# Altium PCB TMP116.PcbDoc
Units mil, origin at the board's own origin, x right, y up, seen from the top; angles counter-clockwise.
Board outline 6000 x 4000 mil, 2 copper layers (Top Layer, Bottom Layer); 4 components, 4 nets, 17 pads, 9 vias.
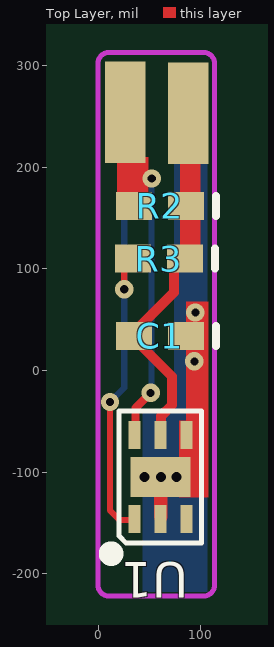
[diagram p0: Top Layer view]
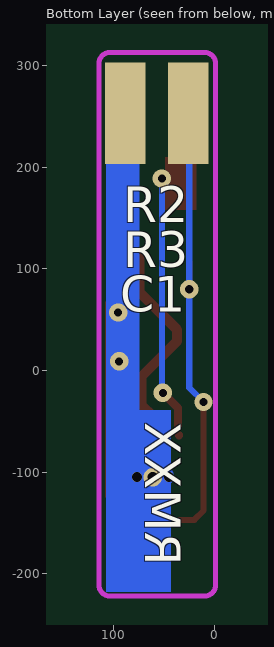
[diagram p1: Bottom Layer view, seen from below]

## Layer stack, top to bottom
Top Solder: solder mask 0.4, Solder Resist, Dk 3.5
Top Layer: signal copper 1.4
Dielectric1: dielectric 12.6, FR-4, Dk 4.8
Bottom Layer: signal copper 1.4
Bottom Solder: solder mask 0.4, Solder Resist, Dk 3.5

## Board outline
-3979,-1907 2021,-1907 2021,2093 -3979,2093

## Design rules (kind name [scope] priority, off if disabled: settings)
Clearance [All] p1 off: gap=10
FabricationTestPointUsage TestPointUsage [All] p1: valid=0 allowmultiple=FALSE
FabricationTestpoint Testpoint [All] p1: side=3 testpointundercomponent=TRUE minsize=40 maxsize=100 preferedsize=60 minholesize=0 maxholesize=40 preferedholesize=32 testpointgrid=1 allowsidetop=TRUE allowsidebottom=TRUE usegrid=TRUE gridtolerance=0.01
PolygonConnect [All] p1: connectstyle=Relief reliefconductorwidth=10 reliefentries=4 polygonreliefangle="90 Angle" airgapwidth=10
RoutingVias [All] p1: holewidth=20 width=12 viastyle="Through Hole" minholewidth=6 minwidth=8 maxholewidth=100 maxwidth=150
SolderMaskExpansion [All] p1: expansion=4
Width [All] p1: maxlimit=100 minlimit=5 preferedwidth=10 minimp=50.000000 maximp=50.000000 favimp=50.000000
28 further rules are at their usual default settings.

## Components (designator, comment, footprint, x,y, rotation, side; value= is the part's Value field where it differs from the comment)
C1 "Cap Semi" 0402 60,34 r180 top
R2 "Res1" 0402 60,162 r180 top
R3 "Res1" 0402 59,110 r180 top
U1 "Sensor" WSON 45,-105 r90 top

## Footprints (in the part's own frame and the unit in brackets; to place one, negate y for a bottom-side part, rotate by r counter-clockwise, add the part's x,y. Pads: shape width x height; smd on the part's side, far side on the other; paste and mask are expansions set on the pad)
0402 [mm] "Chip Capacitor; Body 1.0 x 0.5 mm (LxW typ)"
  rect 0.9x0.7 smd: 1(-0.65,0) 2(0.65,0)
  silkscreen extent -1.4,-0.25 -1.4,0.25
WSON [mm]
  rect 0.7x0.3 smd: 1(-1.05,0.25) 2(-1.05,-0.4) 3(-1.05,-1.05) 4(1.05,-1.05) 5(1.05,-0.4) 6(1.05,0.25)
  rect 1x1.5 smd: 2(0,-0.4)
  silkscreen extent -2.02,-1.42 1.65,0.95

## Part data
C1: "Capacitor (Semiconductor SIM Model)"
R2 R3: "Resistor"
U1: library part TMP116

## Free pads (board coordinates)
  rect 40x100 smd: 2(26,254) 2(88,253)
  rect 40x100 smd far side: 3(26,253) 3(88,253)

## Via types
v1: diameter 18, hole 8, Top Layer to Bottom Layer, 6 vias
v2: diameter 9.84, hole 9.84, Top Layer to Bottom Layer, 2 vias
v3: diameter 18, hole 10, Top Layer to Bottom Layer, 1 vias

## Nets (pads, with @x,y where several pads share a name; then routed paths per layer and width w, separated by ;. In a path a pad name is that pad's centre, name@x,y a point inside that pad or via, vN(x,y) a via of type N, cw(c..) or ccw(c..) an arc to the next point about the centre after c; other vN are vias at no path point)
GND: C1.1 pad.3@88,253 U1.2 U1.4 | length 454.6
  Top Layer w6: U1.2@61,-147 U1.2@60.99,-146.34
  Top Layer w13: U1.2@61,-144 U1.2@61,-120
  Bottom Layer w20: 50,-104 87,-104 94,-97 pad.3@94,286
  other v1: 94,9 95,57
  other v2: 45,-105 76.5,-105
  other v3: 61,-105
SCL: pad.3@26,253 R3.2 U1.1 | length 476.9
  Top Layer w6: v1@10,-31 11,-32 11,-138 20,-147 U1.1@35,-147 ; v1(25,80) R3.2@25,107
  Bottom Layer w6: v1(11,-31) 25,-17 v1(25,80) pad.3@25,278
SDA: pad.2@26,254 R2.2 U1.6 | length 291.6
  Top Layer w8: U1.6@35,-64 U1.6@35,-63.66 ; U1.6@36,-54 36,-37 v1(51,-22)
  Top Layer w20: pad.2@31,227 pad.2@31,265
  Bottom Layer w6: v1@52,-22 v1@52,193
  other v1: 52,189
VCC: C1.2 pad.2@88,253 R2.1 R3.1 U1.5 | length 329.4
  Top Layer w10: U1.5@61,-67 61,-45 72,-34 72,-6 37,29 37,40 74,77 R3.1@74,112
  Top Layer w20: R3.1@90,109 pad.2@90,225
pads on no net: U1.3

## Keep-outs
Keep-Out Layer:
  lines w5: 103,313 cw(c103,302) 114,302 114,-211 cw(c103,-211) 103,-222 10,-222 cw(c10,-211) -1,-211 -1,302 cw(c10,302) 10,313 104,313

## Other copper
Top Layer:
  rectangle net SDA: 18,158 49,210
  rectangle net VCC: 77,216 97,266
  rectangle net GND: 79,-125 108,-49
  rectangle net GND: 86,-62 108,68
Bottom Layer:
  rectangle net GND: 43,-218 107,-39
  rectangle net GND: 74,-65 107,213

## Silkscreen, mask and mechanical layers (free items; w line width, h text height)
Bottom Overlay:
  text "RMXX" at 80,-192 h60 r90